# Altium PCB PCB_Con.PcbDoc
Units mm, origin at the board's own origin, x right, y up, seen from the top; angles counter-clockwise.
Board outline 48.26 x 45.72 mm, 2 copper layers (Top Layer, Bottom Layer); 6 components, 12 nets, 52 pads, 0 vias.
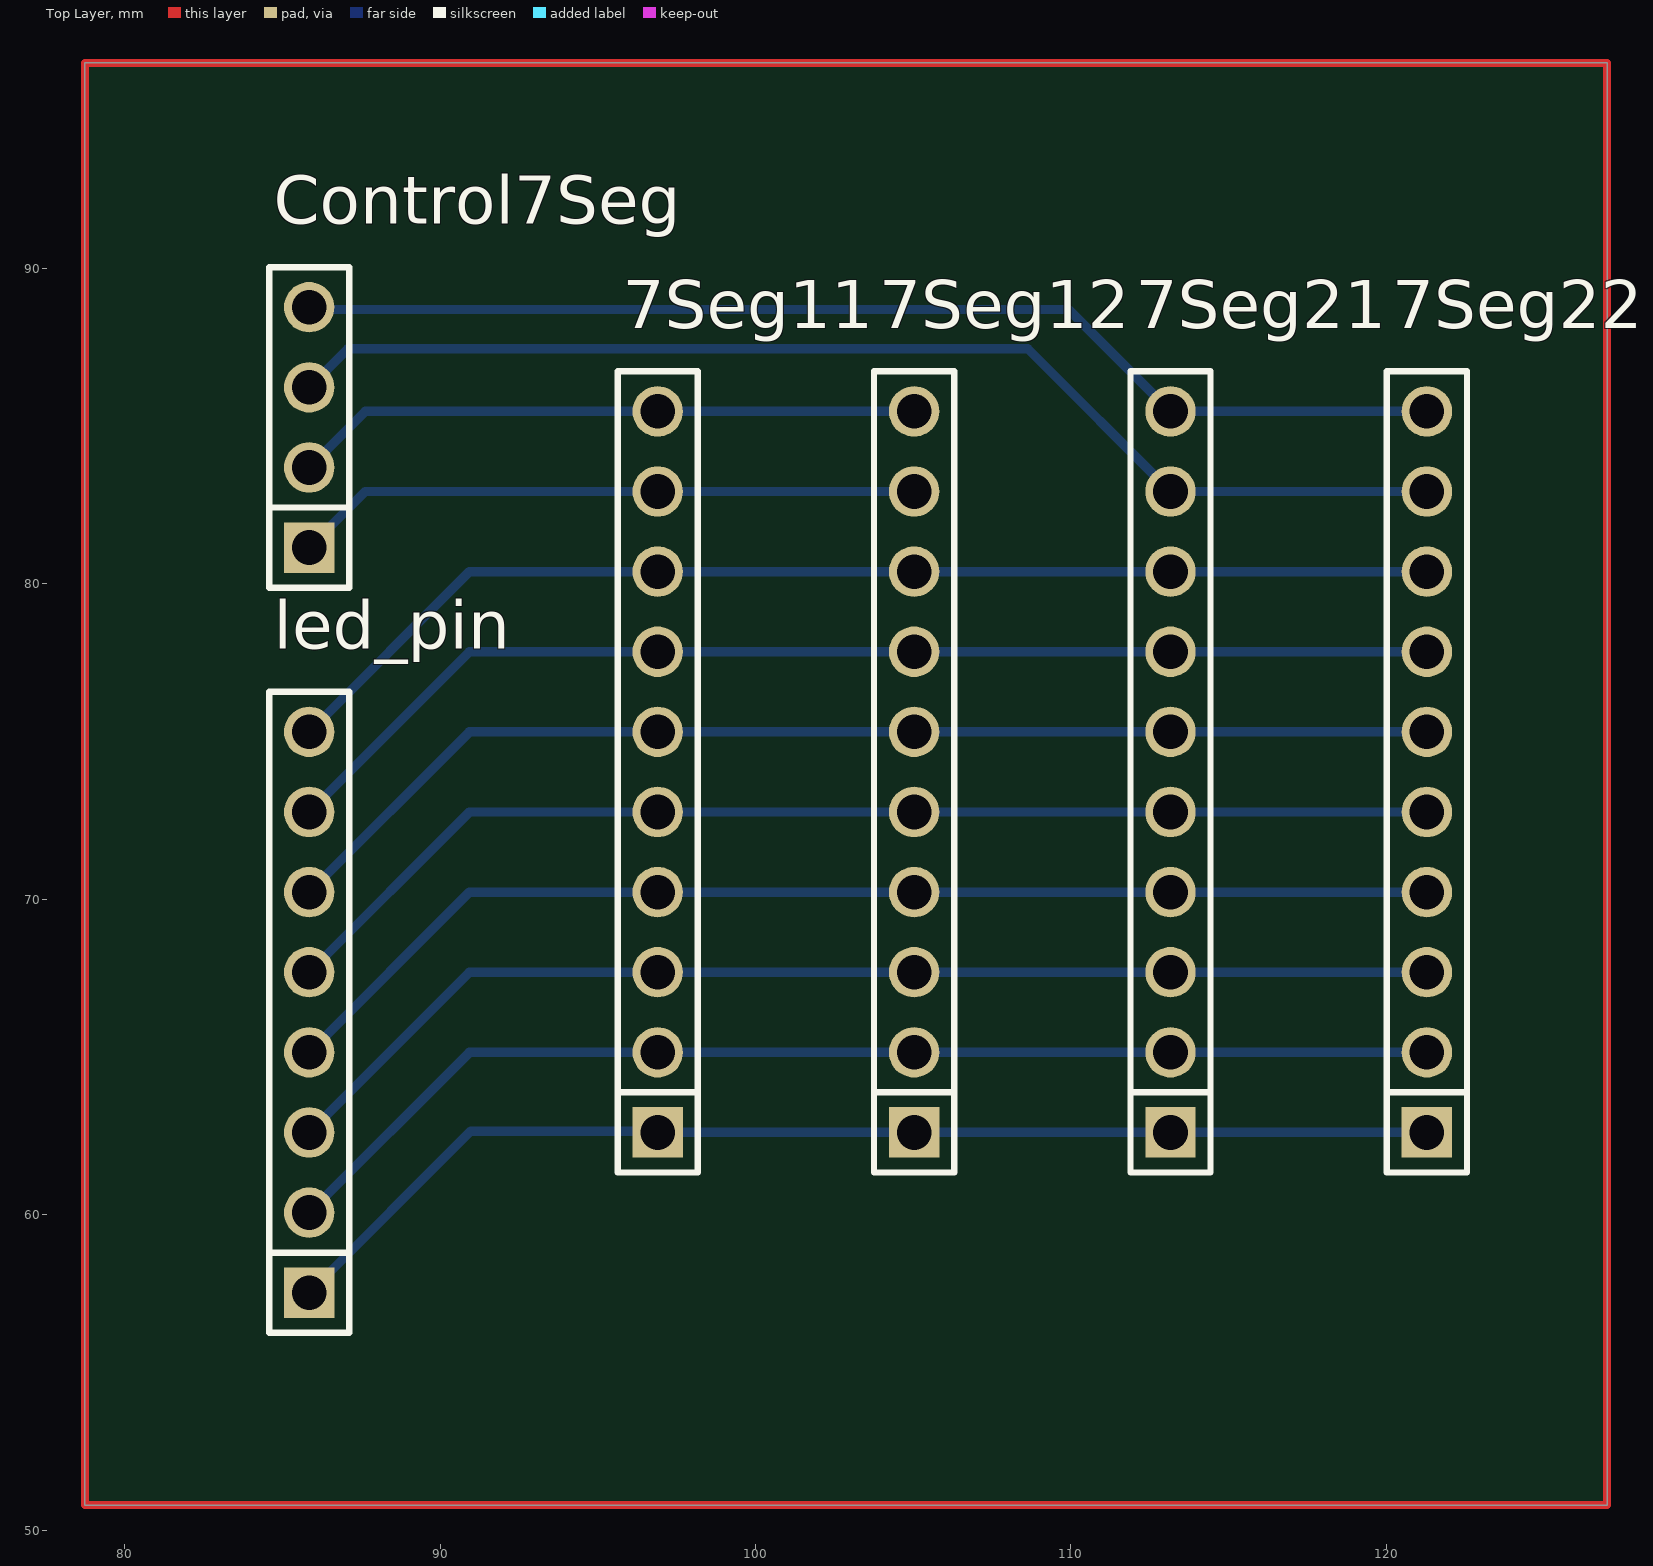
[diagram p0: Top Layer view]
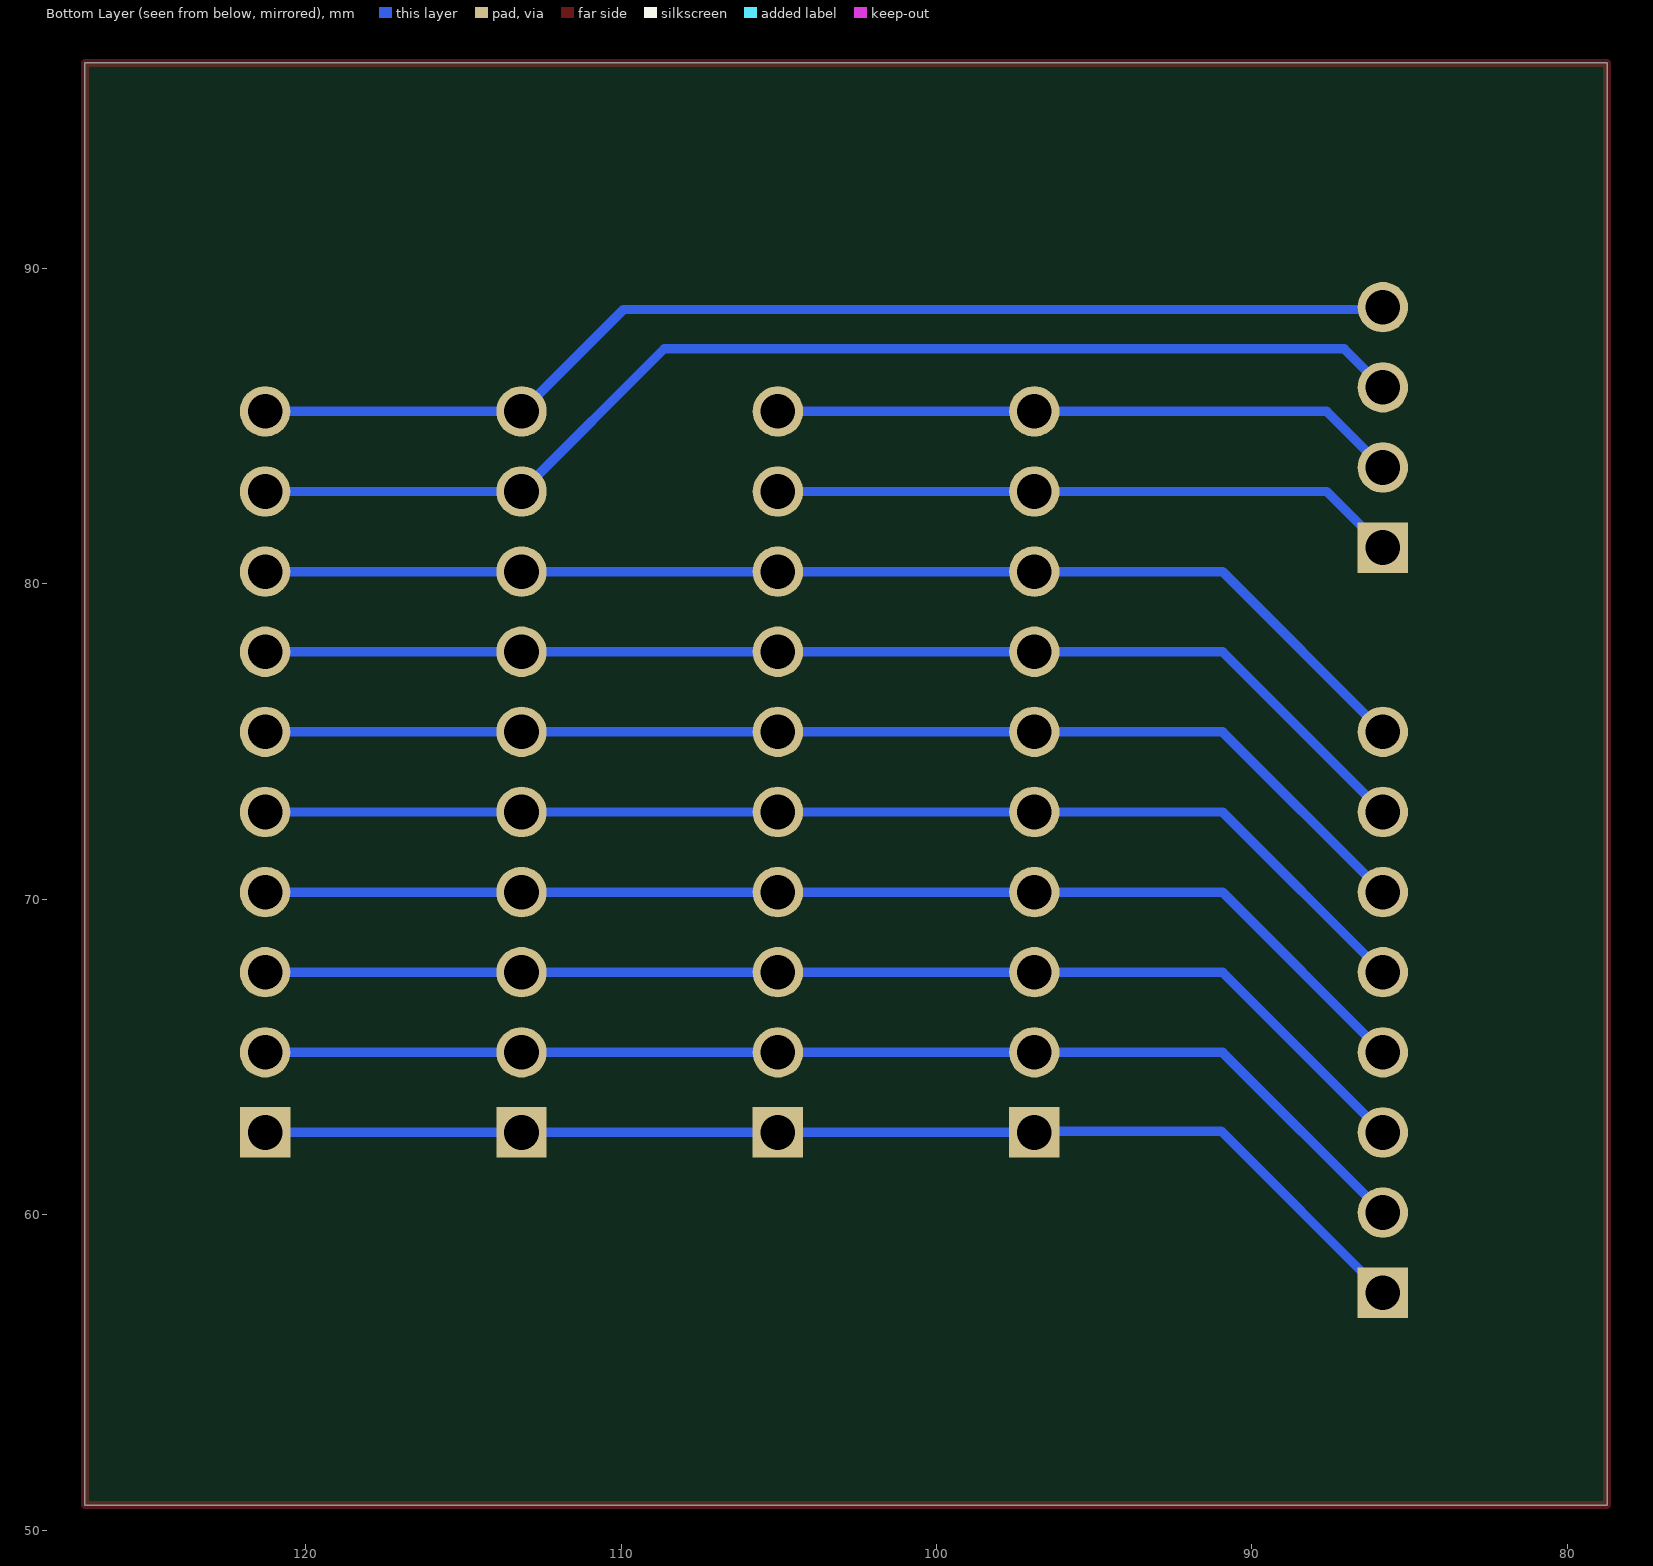
[diagram p1: Bottom Layer view, seen from below]
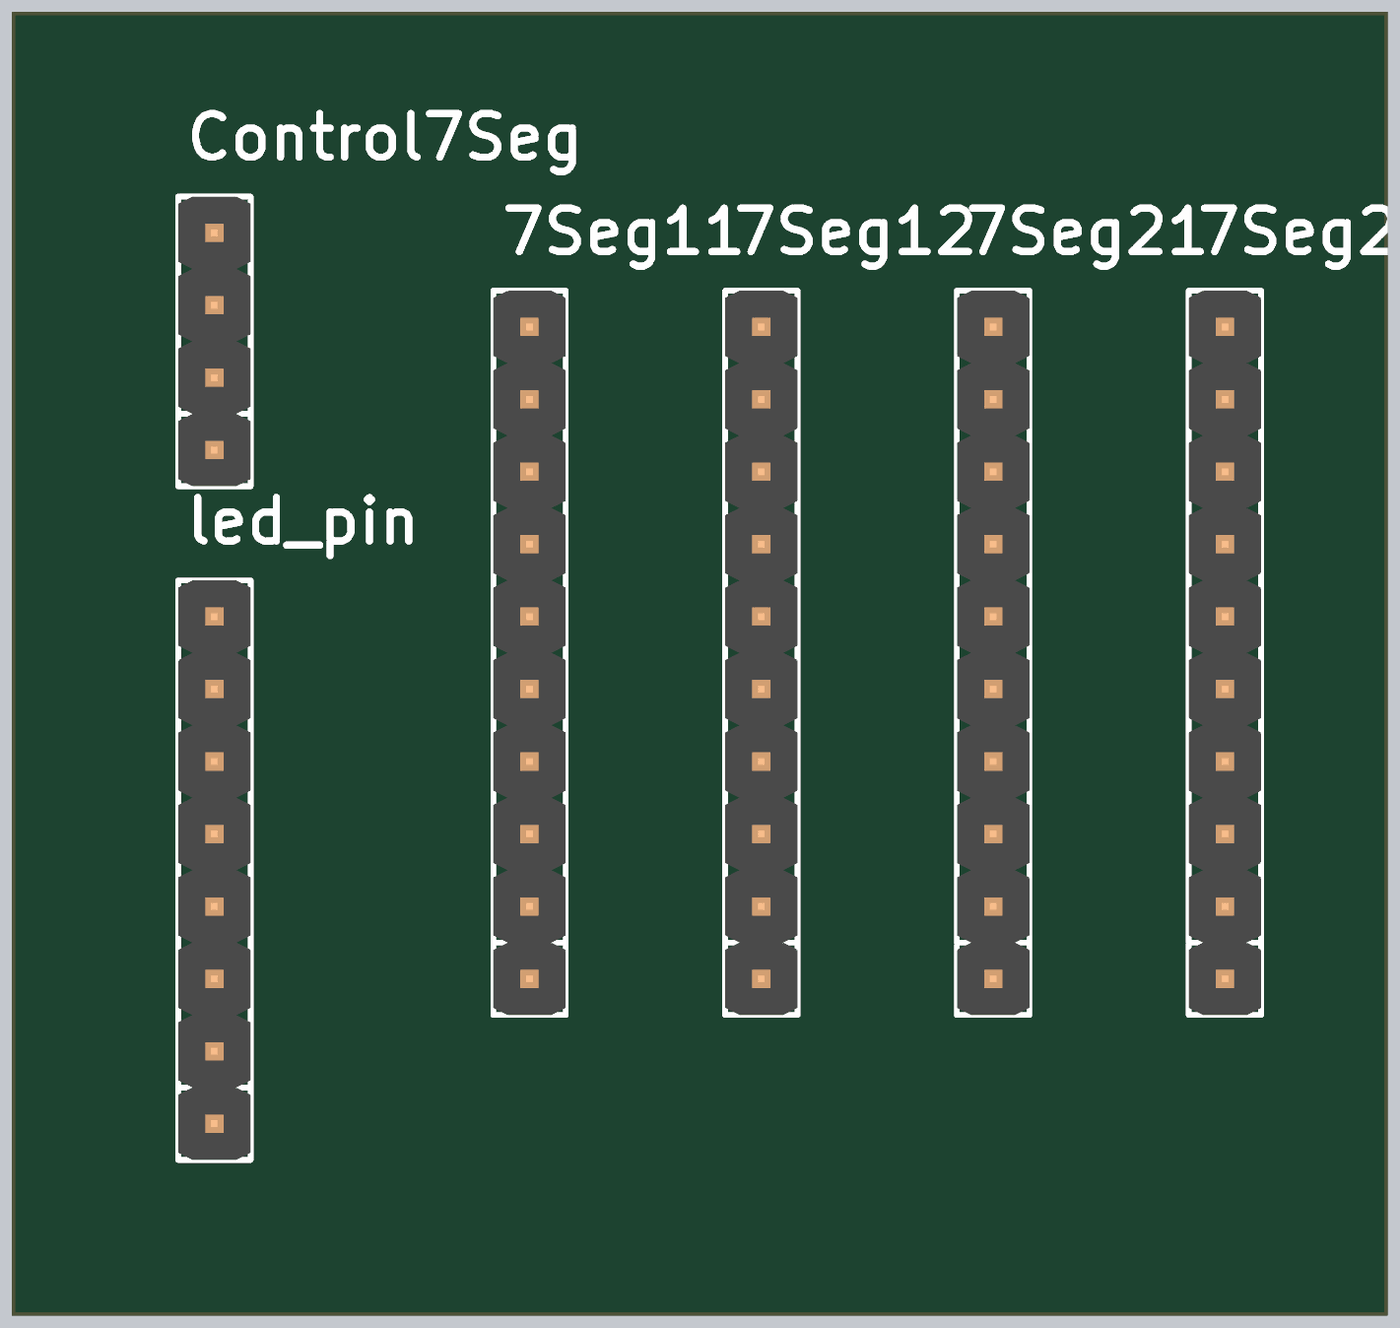
[diagram p2: 3D render of the assembled board from above, using the file's embedded part models]

## Layer stack, top to bottom
Top Solder: solder mask 0.0102, Solder Resist, Dk 3.5
Top Layer: signal copper 0.0356
Dielectric 1: dielectric 0.32, FR-4, Dk 4.8
Bottom Layer: signal copper 0.0356
Bottom Solder: solder mask 0.0102, Solder Resist, Dk 3.5

## Board outline
78.74,50.8 127,50.8 127,96.52 78.74,96.52

## Design rules (kind name [scope] priority, off if disabled: settings)
Clearance [All] p1: gap=0.3
PolygonConnect [All] p1: connectstyle=Relief reliefconductorwidth=0.254 reliefentries=4 polygonreliefangle="90 Angle" airgapwidth=0.254
RoutingLayers [All] p1: top layer_v5=FALSE bottom layer_v5=TRUE
RoutingVias [All] p1: holewidth=0.711 width=1.27 viastyle="Through Hole" minholewidth=0.711 minwidth=1.27 maxholewidth=0.711 maxwidth=1.27
SolderMaskExpansion [All] p1: expansion=0.102
Width NET [All] p1: maxlimit=0.3 minlimit=0.3 preferedwidth=0.3
29 further rules are at their usual default settings.

## Components (designator, comment, footprint, x,y, rotation, side; value= is the part's Value field where it differs from the comment)
7Seg11 "JP 1x10 2.54" "JP 1x10 DT" 96.901,62.611 r90 top
7Seg12 "JP 1x10 2.54" "JP 1x10 DT" 105.029,62.611 r90 top
7Seg21 "JP 1x10 2.54" "JP 1x10 DT" 113.157,62.611 r90 top
7Seg22 "JP 1x10 2.54" "JP 1x10 DT" 121.285,62.611 r90 top
Control7Seg "JP 1x4 2.54" "JP 1x4 DT" 85.852,81.153 r90 top
led_pin "JP 1x8 2.54" "JP 1x8 DT" 85.852,57.531 r90 top

## Footprints (in the part's own frame and the unit in brackets; to place one, negate y for a bottom-side part, rotate by r counter-clockwise, add the part's x,y. Pads: shape width x height; smd on the part's side, far side on the other; paste and mask are expansions set on the pad)
"JP 1x4 DT" [mm] "4 pins, 1 row, straight, gold plating"
  rect 1.6x1.6 hole 1.1: 1(0,0)
  round 1.6 hole 1.1: 2(2.54,0) 3(5.08,0) 4(7.62,0)
  silkscreen extent -1.27,-1.27 8.89,1.27, body extent -1.27,-1.27 8.89,1.27, height 8.54
"JP 1x8 DT" [mm] "8 pins, 1 row, straight, gold plating"
  rect 1.6x1.6 hole 1.1: 1(0,0)
  round 1.6 hole 1.1: 2(2.54,0) 3(5.08,0) 4(7.62,0) 5(10.16,0) 6(12.7,0) 7(15.24,0) 8(17.78,0)
  silkscreen extent -1.27,-1.27 19.05,1.27, body extent -1.27,-1.27 19.05,1.27, height 8.54
"JP 1x10 DT" [mm] "10 pins, 1 row, straight, gold plating"
  rect 1.6x1.6 hole 1.1: 1(0,0)
  round 1.6 hole 1.1: 2(2.54,0) 3(5.08,0) 4(7.62,0) 5(10.16,0) 6(12.7,0) 7(15.24,0) 8(17.78,0) 9(20.32,0) 10(22.86,0)
  silkscreen extent -1.27,-1.27 24.13,1.27, body extent -1.27,-1.27 24.13,1.27, height 8.54

## Part data
7Seg11 7Seg12 7Seg21 7Seg22: library part "JP 1x10 2.54 Duc Thang", "C?m"
Control7Seg: library part "JP 1x4 2.54 Duc Thang", "C?m"
led_pin: library part "JP 1x8 2.54 Duc Thang", "C?m"

## Nets (pads, with @x,y where several pads share a name; then routed paths per layer and width w, separated by ;. In a path a pad name is that pad's centre, name@x,y a point inside that pad or via, vN(x,y) a via of type N, cw(c..) or ccw(c..) an arc to the next point about the centre after c; other vN are vias at no path point)
Net7Seg11_1: 7Seg11.1 7Seg12.1 7Seg21.1 7Seg22.1 led_pin.1 | length 37.6
  Bottom Layer w0.3: led_pin.1 90.975,62.654 96.858,62.654 7Seg11.1 7Seg12.1 7Seg21.1 7Seg22.1
Net7Seg11_2: 7Seg11.2 7Seg12.2 7Seg21.2 7Seg22.2 led_pin.2 | length 37.5
  Bottom Layer w0.3: led_pin.2 90.932,65.151 7Seg11.2 7Seg12.2 7Seg21.2 7Seg22.2
Net7Seg11_3: 7Seg11.3 7Seg12.3 7Seg21.3 7Seg22.3 led_pin.3 | length 37.5
  Bottom Layer w0.3: led_pin.3 90.932,67.691 7Seg11.3 7Seg12.3 7Seg21.3 7Seg22.3
Net7Seg11_4: 7Seg11.4 7Seg12.4 7Seg21.4 7Seg22.4 led_pin.4 | length 37.5
  Bottom Layer w0.3: led_pin.4 90.932,70.231 7Seg11.4 7Seg12.4 7Seg21.4 7Seg22.4
Net7Seg11_5: 7Seg11.5 7Seg12.5 7Seg21.5 7Seg22.5 led_pin.5 | length 37.5
  Bottom Layer w0.3: led_pin.5 90.932,72.771 7Seg11.5 7Seg12.5 7Seg21.5 7Seg22.5
Net7Seg11_6: 7Seg11.6 7Seg12.6 7Seg21.6 7Seg22.6 led_pin.6 | length 37.5
  Bottom Layer w0.3: led_pin.6 90.932,75.311 7Seg11.6 7Seg12.6 7Seg21.6 7Seg22.6
Net7Seg11_7: 7Seg11.7 7Seg12.7 7Seg21.7 7Seg22.7 led_pin.7 | length 37.5
  Bottom Layer w0.3: led_pin.7 90.932,77.851 7Seg11.7 7Seg12.7 7Seg21.7 7Seg22.7
Net7Seg11_8: 7Seg11.8 7Seg12.8 7Seg21.8 7Seg22.8 led_pin.8 | length 37.5
  Bottom Layer w0.3: led_pin.8 90.932,80.391 7Seg11.8 7Seg12.8 7Seg21.8 7Seg22.8
Net7Seg11_9: 7Seg11.9 7Seg12.9 Control7Seg.1 | length 19.9
  Bottom Layer w0.3: Control7Seg.1 87.63,82.931 7Seg11.9 7Seg12.9
Net7Seg11_10: 7Seg11.10 7Seg12.10 Control7Seg.2 | length 19.9
  Bottom Layer w0.3: Control7Seg.2 87.63,85.471 7Seg11.10 7Seg12.10
Net7Seg21_9: 7Seg21.9 7Seg22.9 Control7Seg.3 | length 37.8
  Bottom Layer w0.3: Control7Seg.3 87.077,87.458 108.63,87.458 7Seg21.9 7Seg22.9
Net7Seg21_10: 7Seg21.10 7Seg22.10 Control7Seg.4 | length 36.8
  Bottom Layer w0.3: Control7Seg.4 85.924,88.701 109.927,88.701 7Seg21.10 7Seg22.10
copper on no net: | length 188
  Top Layer w0.254: 78.74,50.8 127,50.8 127,96.52 78.74,96.52 78.74,50.8